# Altium PCB PCB_飞控板设计_7_2021-09-04.pcbdoc
Units mm, origin at the board's own origin, x right, y up, seen from the top; angles counter-clockwise.
Board outline 109.65 x 103 mm, 2 copper layers (Top Layer, Bottom Layer); 11 components, 42 nets, 154 pads, 13 vias.
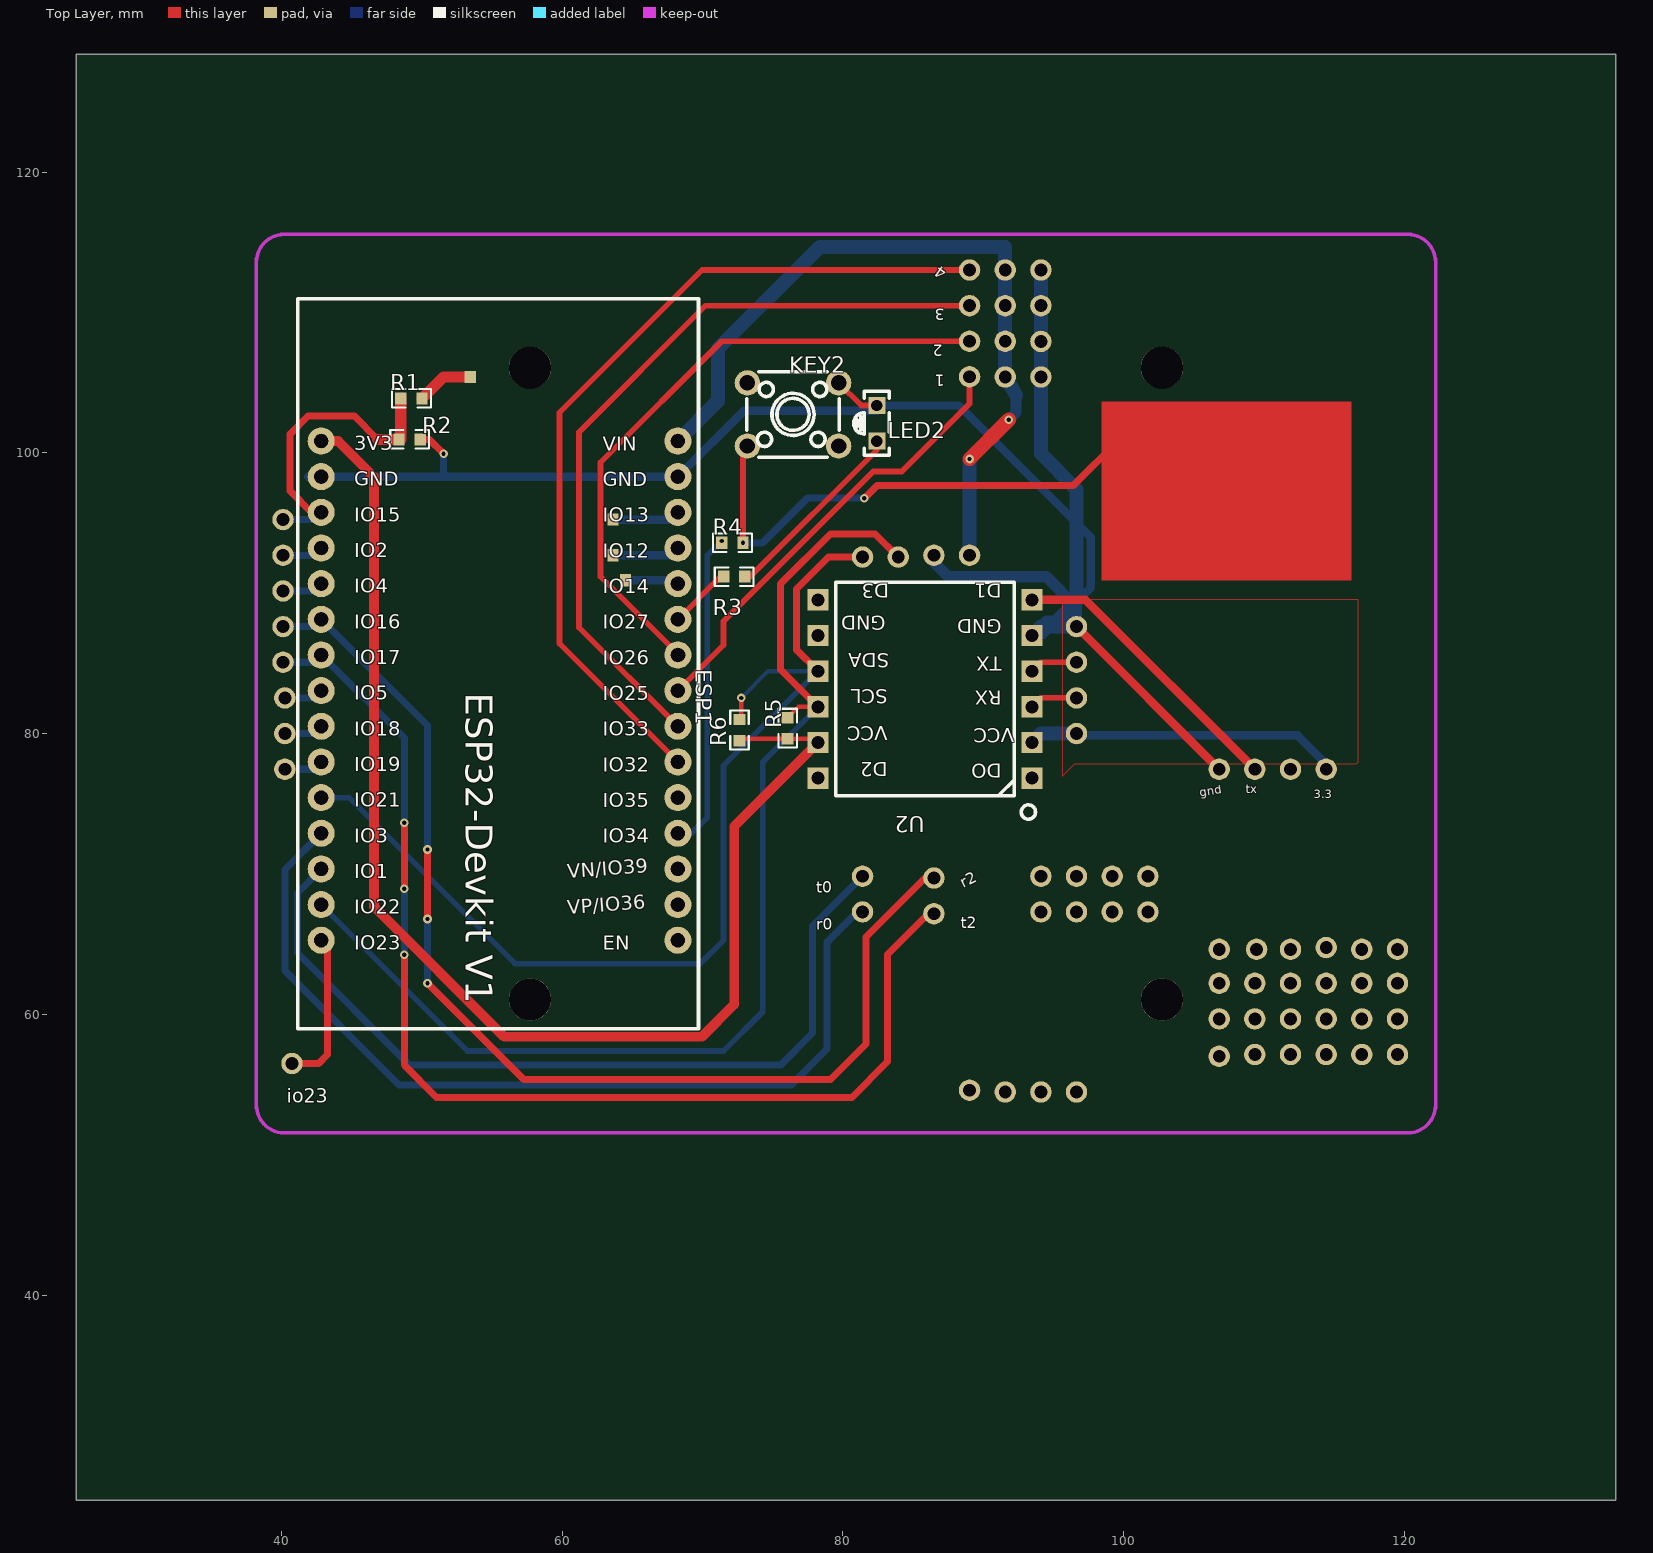
[diagram p0: Top Layer view]
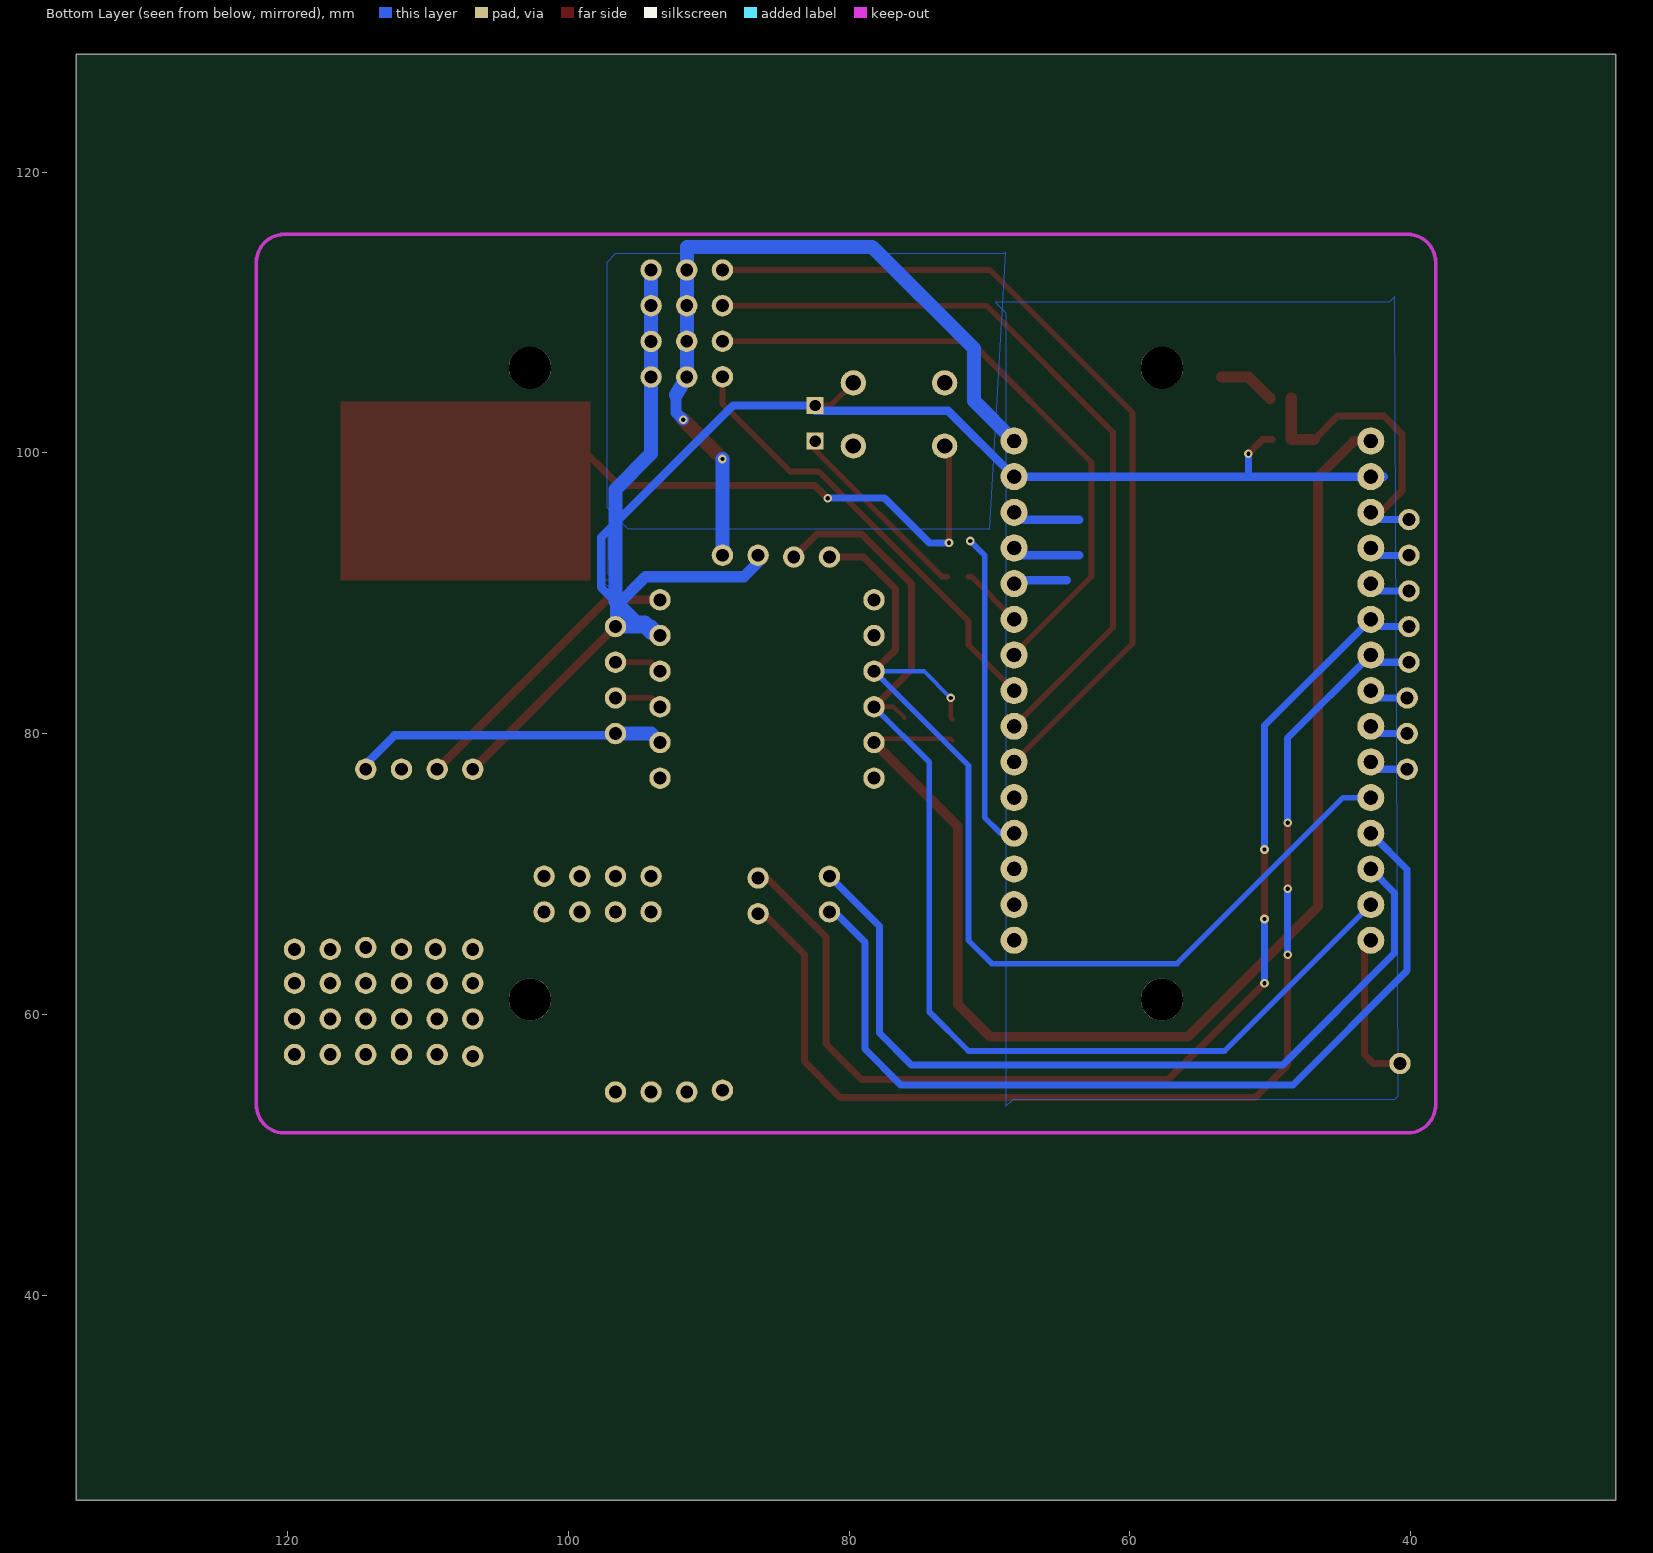
[diagram p1: Bottom Layer view, seen from below]

## Layer stack, top to bottom
Top Layer: signal copper (thickness not stored)
Dielectric: dielectric 0.32, FR-4, Dk 4.8
Bottom Layer: signal copper (thickness not stored)

## Board outline
135.054,25.4 25.4,25.4 25.4,128.4 135.054,128.4

## Components (designator, comment, footprint, x,y, rotation, side; value= is the part's Value field where it differs from the comment)
ESP1 "ESP32DEVKITV1" ESP32-DEVKITV1 55.118,84.331 r270 top
KEY2 "K4-6×6_TH" KEY-TH_4P-L6.0-W6.0-P4.50-LS6.5 76.454,102.746 r0 top
LED2 "LED" IRL80A 82.423,102.111 r0 top
R1 "5.64k" R0603 49.276,103.889 r180 top
R2 "2k" R0603 49.149,100.968 r0 top
R3 "220" R0603 72.263,91.189 r0 top
R4 "8.2k" R0603 72.136,93.602 r0 top
R5 "4.7k" R0603 76.073,80.394 r90 top
R6 "4.7k" R0603 72.644,80.267 r90 top
U2 "JY901" JY901 93.472,76.838 r180 top
? "" ? 80.264,46.699 r0 top

## Footprints (in the part's own frame and the unit in brackets; to place one, negate y for a bottom-side part, rotate by r counter-clockwise, add the part's x,y. Pads: shape width x height; smd on the part's side, far side on the other; paste and mask are expansions set on the pad)
ESP32-DEVKITV1 [mil]
  round 76 hole 39.36: 3V3(-650.39,-483.07) D1(549.61,-483.07) D2(-350.39,-483.07) D3(449.61,-483.07) D4(-250.39,-483.07) D5(49.61,-483.07) D12(-350.39,517.12) D13(-450.39,517.12) D14(-250.39,517.12) D15(-450.39,-483.07) D16(-150.39,-483.07) D17(-50.39,-483.07) D18(149.61,-483.07) D19(249.61,-483.07) D21(349.61,-483.07) D22(649.61,-483.07) D23(749.6,-483.07) D25(49.61,517.12) D26(-50.39,517.12) D27(-150.39,517.12) D32(249.61,517.12) D33(149.61,517.12) D34(449.61,517.12) D35(349.61,517.12) D36(649.61,517.12) D39(549.61,517.12) EN(749.6,517.12) GND@1(-550.39,517.12) GND@2(-550.39,-483.07) VIN(-650.39,517.12)
  silkscreen extent -1049,-548 998,575
IRL80A [mil]
  rect 47.7x47.7 hole 32: A(0,-50) K(0,50)
  silkscreen extent -65,-90 35,90
JY901 [mil]
  rect 60x60 smd: 1(0,0) 2(0,-100) 3(0,-200) 4(0,-300) 5(0,-400) 6(0,-500) 7(600,0) 8(600,-100) 9(600,-200) 10(600,-300) 11(600,-400) 12(600,-500)
  silkscreen extent -10,-549 551,115
KEY-TH_4P-L6.0-W6.0-P4.50-LS6.5 [mm]
  round 1.8 hole 1.1: 1(-3.251,-2.25) 2(3.251,-2.25) 3(3.251,2.25) 4(-3.251,2.25)
  silkscreen extent -3.3,-3.05 3.3,3.05
R0603 [mm]
  rect 0.806x0.864 smd: 1(-0.753,0) 2(0.753,0)
  silkscreen extent -1.39,-0.66 1.39,0.66
? [mm]

## Free pads (board coordinates)
  round 1.524 hole 0.914: 1(78.232,89.538) 2(78.232,86.998) 3(78.232,84.458) 4(78.232,81.918) 5(78.232,79.378) 6(78.232,76.838) 7(93.472,76.838) 8(93.472,79.378) 9(93.472,81.918) 10(93.472,84.458) 11(93.472,86.998) 12(93.472,89.538) 13(96.647,85.093) 14(96.647,82.553) 15(68.326,85.601) 16(89.027,113.033) 17(89.027,110.493) 18(89.027,107.953) 19(89.027,105.425) 20(91.567,105.413) 22(91.567,107.953) 23(91.567,110.492) 24(91.567,113.033) 25(94.107,113.033) 26(94.107,110.491) 27(94.107,107.943) 28(94.107,105.412) 29(96.647,87.633) 30(96.647,80.013) 32(81.407,69.853) 33(81.407,67.313) 35(40.259,77.473) 36(40.259,80.013) 37(40.259,82.553) 40(40.132,90.173) 41(40.132,92.713) 42(40.132,95.253) 43(40.767,56.518) 44(86.487,69.726) 45(86.487,67.186) 46(40.132,87.633) 47(40.132,85.093) 48(81.407,92.586) 49(83.947,92.586) 50(86.487,92.713) 51(89.027,92.713) 107(106.807,64.646) 108(109.474,64.646) 109(111.887,64.646) 110(114.427,64.773) 111(116.967,64.646) 112(119.507,64.646) 113(119.507,62.233) 114(116.967,62.233) 115(114.427,62.233) 116(111.887,62.233) 117(109.347,62.233) 118(106.807,62.233) 119(106.807,59.693) 120(109.347,59.693) 121(111.887,59.693) 122(114.427,59.693) 123(116.967,59.693) 124(119.507,59.693) 125(119.507,57.153) 126(116.967,57.153) 127(114.427,57.153) 128(111.887,57.153) 129(109.347,57.153) 130(106.807,57.026) 131(94.107,69.853) 132(96.647,69.853) 133(99.187,69.853) 134(101.727,69.853) 135(101.727,67.313) 137(99.187,67.313) 138(96.647,67.313) 139(94.107,67.313) 140(89.027,54.613) 141(91.567,54.486) 142(94.107,54.486) 143(96.647,54.486) 144(106.807,77.473) 145(109.347,77.473) 146(114.427,77.473) 147(111.887,77.473)
  rect 0.806x0.864 smd: 54(53.467,105.413) 63(63.627,95.253) 65(63.627,92.713) 67(64.516,90.935)
  round 3 hole 3 unplated: ""(57.727,61.073) ""(57.727,106.073) ""(102.727,61.073) ""(102.727,106.073)

## Via types
v1: diameter 0.611, hole 0.305, Top Layer to Bottom Layer, 13 vias

## Nets (pads, with @x,y where several pads share a name; then routed paths per layer and width w, separated by ;. In a path a pad name is that pad's centre, name@x,y a point inside that pad or via, vN(x,y) a via of type N, cw(c..) or ccw(c..) an arc to the next point about the centre after c; other vN are vias at no path point)
ESP1_D1: ESP1.D1 pad.32 | length 60.3
  Bottom Layer w0.5: ESP1.D1 41.148,68.671 41.148,64.392 49.149,56.391 75.565,56.391 77.851,58.677 77.851,66.297 78.105,66.551 pad.32
ESP1_D2: ESP1.D2 pad.41 | length 2.9
  Bottom Layer w0.5: pad.41 42.33,92.713 ESP1.D2
ESP1_D3: ESP1.D3 pad.33 | length 64.9
  Bottom Layer w0.5: ESP1.D3 40.259,70.322 40.259,63.122 48.387,54.994 76.327,54.994 78.867,57.534 78.867,65.154 81.026,67.313 pad.33
ESP1_D4: ESP1.D4 pad.40 | length 2.9
  Bottom Layer w0.5: pad.40 42.33,90.173 ESP1.D4
ESP1_D5: ESP1.D5 pad.37 | length 2.8
  Bottom Layer w0.5: pad.37 42.33,82.553 ESP1.D5
ESP1_D12: ESP1.D12 pad.65 | length 4.8
  Bottom Layer w0.6: 63.627,92.713 67.735,92.713 ESP1.D12
ESP1_D13: ESP1.D13 pad.63 | length 4.8
  Bottom Layer w0.6: 63.627,95.253 67.735,95.253 ESP1.D13
ESP1_D14: ESP1.D14 pad.67 | length 3.8
  Bottom Layer w0.6: 64.516,90.935 68.009,90.935 ESP1.D14
ESP1_D15: ESP1.D15 pad.42 R1.2 R2.1 | length 21.8
  Top Layer w0.5: ESP1.D15 42.154,95.771 40.64,97.285 40.64,101.349 41.91,102.619 45.212,102.619 46.863,100.968
  Top Layer w0.8: 46.863,100.968 48.522,100.968 R1.2
  Bottom Layer w0.5: pad.42 42.33,95.253 ESP1.D15
ESP1_D16: ESP1.D16 pad.44 pad.46 | length 81.3
  Top Layer w0.5: v1(50.419,62.233) 57.277,55.375 79.121,55.375 81.661,57.915 81.661,65.535 85.852,69.726 pad.44 ; v1(50.419,66.805) v1(50.419,71.758)
  Bottom Layer w0.5: pad.46 42.33,87.633 ESP1.D16 50.419,80.58 v1(50.419,71.758) ; v1(50.419,62.233) v1(50.419,66.805)
ESP1_D17: ESP1.D17 pad.45 pad.47 | length 83.2
  Top Layer w0.5: v1(48.768,64.265) 48.768,56.391 51.054,54.105 80.645,54.105 83.185,56.645 83.185,64.265 86.106,67.186 pad.45 ; v1(48.768,68.964) v1(48.768,73.663)
  Bottom Layer w0.5: pad.47 42.33,85.093 ESP1.D17 48.768,79.691 v1(48.768,73.663) ; v1(48.768,64.265) v1(48.768,68.964)
ESP1_D18: ESP1.D18 pad.36 | length 2.8
  Bottom Layer w0.5: pad.36 42.33,80.013 ESP1.D18
ESP1_D19: ESP1.D19 pad.35 | length 2.8
  Bottom Layer w0.5: pad.35 42.33,77.473 ESP1.D19
ESP1_D23: ESP1.D23 pad.43 | length 11.1
  Top Layer w0.5: pad.43 42.672,56.518 43.307,57.153 43.307,64.832 ESP1.D23
ESP1_D25: ESP1.D25 pad.19 | length 32.4
  Top Layer w0.4: ESP1.D25 71.501,86.32 71.501,88.014 82.169,98.682 84.201,98.682 89.027,103.508 pad.19@89.027,105.667
ESP1_D26: ESP1.D26 pad.15 pad.18 | length 45.9
  Top Layer w0.4: pad.15 62.738,91.189 62.738,99.317 71.374,107.953 pad.18
ESP1_D32: ESP1.D32 pad.16 | length 61.8
  Top Layer w0.4: ESP1.D32 59.817,86.426 59.817,102.873 69.977,113.033 pad.16
ESP1_D33: ESP1.D33 pad.17 | length 55.4
  Top Layer w0.4: ESP1.D33 61.214,87.569 61.214,101.476 70.231,110.493 pad.17
ESP1_D35: ESP1.D35
ESP1_D36: ESP1.D36
ESP1_D39: ESP1.D39
ESP1_EN: ESP1.EN
ESP1_VIN: ESP1.VIN pad.20 pad.22 pad.23 pad.24 pad.51 | length 54.8
  Top Layer w1: v1(89.027,99.571) v1(91.821,102.365)
  Bottom Layer w0.8: v1(91.821,102.365) 92.329,102.873 92.329,104.143
  Bottom Layer w1: ESP1.VIN 71.12,103.719 71.12,107.445 78.359,114.684 91.567,114.684 pad.24 pad.23 pad.22 pad.20 92.329,104.143 ; pad.51 v1(89.027,99.571)
GND: ESP1.GND@1 ESP1.GND@2 KEY2.3 LED2.K pad.11 pad.25 pad.26 pad.27 pad.28 pad.29 pad.50 pad.144 R2.2 U2.5 | length 145.9
  Top Layer w0.4: KEY2.3 81.321,103.381 LED2.K
  Top Layer w0.5: R2.2 50.546,100.968 v1(51.562,99.952)
  Top Layer w0.6: pad.29 pad.144
  Bottom Layer w0.5: 49.698,98.311 51.562,98.311 v1(51.562,99.952) ; pad.29 96.647,90.548 pad.29
  Bottom Layer w0.6: 41.91,98.311 68.253,98.311 72.941,103 82.423,103 LED2.K 88.265,103.381 97.663,93.983 97.663,90.427 94.234,86.998 pad.11
  Bottom Layer w0.8: pad.50 86.487,92.205 87.503,91.189 94.488,91.189 96.647,89.03 pad.29 ; pad.11 94.502,88.028 95.264,88.028
  Bottom Layer w1: pad.11 94.107,87.633 pad.29 ; pad.25 pad.26 pad.27 pad.28 94.107,99.952 96.647,97.412 96.647,89.411 95.298,88.062
KEY2_2: KEY2.2
KEY2_4: KEY2.4
R1_1: pad.54 R1.1 | length 4.1
  Top Layer w0.8: R1.1 51.553,105.413 pad.54
R3_1: ESP1.D27 R3.1 | length 4.5
  Top Layer w0.4: ESP1.D27 71.291,91.189 R3.1
R3_2: LED2.A R3.2 | length 13.8
  Top Layer w0.4: R3.2 73.406,91.189 82.423,100.206 LED2.A
R4_1: ESP1.D34 R4.1 | length 22.7
  Bottom Layer w0.4: ESP1.D34 69.225,72.911 70.358,74.044 70.358,92.713 v1(71.374,93.729)
R4_2: KEY2.1 R4.2 | length 36.9
  Top Layer w0.4: v1(72.889,93.602) 72.889,100.182 KEY2.1
  Top Layer w0.5: v1(81.534,96.777) 82.423,97.666 96.393,97.666 99.695,100.968
  Bottom Layer w0.5: v1(72.889,93.602) 74.295,93.602 77.47,96.777 v1(81.534,96.777)
U2_1: pad.7 U2.1
U2_2: pad.8 pad.30 pad.146 U2.2 | length 22.5
  Bottom Layer w0.6: pad.30 96.774,79.886 112.395,79.886 114.427,77.854 pad.146
  Bottom Layer w1: pad.8 94.107,80.013 pad.30
U2_3: pad.9 pad.14 U2.3 | length 3.4
  Top Layer w0.4: U2.3 94.107,82.553 pad.14
U2_4: pad.10 pad.13 U2.4 | length 3.4
  Top Layer w0.4: U2.4 94.107,85.093 pad.13
U2_6: pad.12 pad.145 U2.6 | length 20.9
  Top Layer w0.6: U2.6 97.282,89.538 pad.145
U2_7: pad.6 U2.7
U2_9: ESP1.D22 pad.4 pad.49 R5.2 U2.9 | length 83.2
  Top Layer w0.3: R5.2 76.844,81.918 U2.9
  Top Layer w0.5: U2.9 75.565,84.585 75.565,90.681 79.121,94.237 82.296,94.237 pad.49
  Bottom Layer w0.4: ESP1.D22 53.271,57.407 71.501,57.407 74.295,60.201 74.295,77.981 pad.4
U2_10: ESP1.D21 pad.3 pad.48 pad.107 pad.108 pad.109 pad.110 pad.111 pad.112 pad.113 pad.114 pad.115 pad.116 pad.117 pad.118 pad.119 pad.120 pad.121 pad.122 pad.123 pad.124 pad.125 pad.126 pad.127 pad.128 pad.129 pad.130 pad.131 pad.132 pad.133 pad.134 pad.135 pad.137 pad.138 pad.139 pad.140 pad.141 pad.142 pad.143 pad.147 R6.2 U2.10 | length 82.4
  Top Layer w0.3: R6.2 72.771,81.147 v1(72.771,82.553)
  Top Layer w0.5: U2.10 76.708,85.982 76.708,90.3 78.994,92.586 pad.48
  Bottom Layer w0.3: 74.676,84.458 v1(72.771,82.553) 74.676,84.458 ; 74.676,84.458 pad.3 74.676,84.458
  Bottom Layer w0.4: ESP1.D21 44.821,75.451 56.642,63.63 69.85,63.63 71.501,65.281 71.501,77.727 pad.3
U2_11: pad.2 U2.11
U2_12: pad.1 U2.12
VCC: ESP1.3V3 pad.5 R5.1 R6.1 U2.8 | length 92.8
  Top Layer w0.3: R6.1@72.644,79.513 72.771,79.64 76.073,79.64 77.969,79.64 U2.8
  Top Layer w0.7: ESP1.3V3 44.059,100.851 46.609,98.301 46.609,67.694 55.88,58.423 69.977,58.423 72.263,60.709 72.263,73.409 U2.8

## Polygon pours and split planes (outlines as drawn)
GND on Bottom Layer (solid): 96.901,90.3 96.647,90.554 96.647,94.491 96.901,94.237 97.536,94.237 97.663,94.11 97.663,90.935 96.901,90.3
GND on Bottom Layer (solid): 97.663,90.427 97.282,90.046 96.901,90.046 96.901,90.427 97.028,90.554 97.028,90.681 97.038,90.935 96.774,90.935 96.774,93.856 96.647,93.983 96.647,94.237 96.774,94.364 97.282,94.364 97.282,94.11 97.155,93.983 97.155,93.856 97.038,90.935 97.536,90.935 97.663,90.808 97.663,90.427
GND on Bottom Layer (solid): 96.774,89.792 97.155,90.173 97.155,90.3 96.774,90.681 96.774,90.935 97.155,91.316 97.155,94.11 97.282,94.237 97.282,94.491 96.774,94.999 96.647,94.999
GND on Bottom Layer (solid): 68.834,114.303 68.961,114.176 96.647,114.176 97.282,113.541 97.282,96.142 95.758,94.618 69.977,94.618
GND on Bottom Layer (solid): 41.148,111.128 41.529,110.747 69.596,110.747 68.834,109.985 68.834,53.47 68.326,53.978 41.148,53.978 40.894,54.232 40.894,54.994
GND on Top Layer (solid): 95.504,89.538 95.631,89.411 95.631,76.965 96.52,77.854 116.586,77.854 116.713,77.981 116.713,89.538

## Keep-outs
Keep-Out Layer:
  lines w0.254: 38.227,53.573 ccw(c40.227,53.573) 40.227,51.573 ; 38.227,113.573 cw(c40.227,113.573) 40.227,115.573 ; 120.227,51.573 ccw(c120.227,53.573) 122.227,53.573 ; 120.227,115.573 cw(c120.227,113.573) 122.227,113.573

## Other copper
Top Layer:
  region net R4_2: 98.425,95.888 98.425,103.635 116.205,103.635 116.205,90.935 98.425,90.935

## Silkscreen, mask and mechanical layers (free items; w line width, h text height)
Top Overlay:
  text "4" at 87.478,112.979 h0.8 r145
  text "3" at 87.249,110.258 h0.8 r180
  text "2" at 87.122,107.718 h0.8 r180
  text "1" at 87.249,105.559 h0.8 r180
  text "tx" at 108.712,75.776 h0.6
  text "gnd" at 105.457,75.525 h0.6 r9
  text "3.3" at 113.538,75.395 h0.6
  text "r2" at 88.567,68.985 h0.8 r26
  text "t0" at 78.105,68.691 h0.8
  text "t2" at 88.392,66.151 h0.8
  text "r0" at 78.105,66.024 h0.8
  text "io23" at 40.386,53.732 h1

## Text inside footprints (layer, text, board x,y; h text height)
ESP1: Top Overlay "3V3" at 45.188,100.191 h1.02; Top Overlay "GND" at 45.188,97.651 h1.02; Top Overlay "IO15" at 45.188,95.111 h1.02; Top Overlay "IO2" at 45.188,92.571 h1.02; Top Overlay "IO4" at 45.188,90.031 h1.02; Top Overlay "IO16" at 45.188,87.491 h1.02; Top Overlay "IO17" at 45.188,84.951 h1.02; Top Overlay "IO5" at 45.188,82.411 h1.02; Top Overlay "IO18" at 45.188,79.871 h1.02; Top Overlay "IO19" at 45.188,77.331 h1.02; Top Overlay "IO21" at 45.188,74.791 h1.02; Top Overlay "IO3" at 45.188,72.251 h1.02; Top Overlay "IO1" at 45.188,69.711 h1.02; Top Overlay "IO22" at 45.188,67.171 h1.02; Top Overlay "IO23" at 45.188,64.631 h1.02; Top Overlay "VIN" at 62.908,100.171 h1.02; Top Overlay "GND" at 62.908,97.631 h1.02; Top Overlay "IO13" at 62.908,95.091 h1.02; Top Overlay "IO12" at 62.908,92.551 h1.02; Top Overlay "IO14" at 62.908,90.011 h1.02; Top Overlay "IO27" at 62.908,87.471 h1.02; Top Overlay "IO26" at 62.908,84.931 h1.02; Top Overlay "IO25" at 62.908,82.391 h1.02; Top Overlay "IO33" at 62.908,79.851 h1.02; Top Overlay "IO32" at 62.908,77.311 h1.02; Top Overlay "IO35" at 62.908,74.771 h1.02; Top Overlay "IO34" at 62.908,72.231 h1.02; Top Overlay "VN/IO39" at 60.403,69.692 h1.02 r4; Top Overlay "VP/IO36" at 60.403,67.152 h1.02 r4; Top Overlay "EN" at 62.908,64.611 h1.02; Top Overlay "ESP32-Devkit V1" at 53.137,82.934 h1.93 r270; Document "ESP32-DEVKITV1" at 39.148,72.981 h1.27 r270
U2: Top Overlay "DO" at 91.313,77.854 h1.02 r180; Top Overlay "VCC" at 92.202,80.394 h1.02 r180; Top Overlay "RX" at 91.313,83.061 h1.02 r180; Top Overlay "TX" at 91.313,85.474 h1.02 r180; Top Overlay "GND" at 91.313,88.141 h1.02 r180; Top Overlay "D1" at 91.313,90.681 h1.02 r180; Top Overlay "D2" at 83.185,77.981 h1.02 r180; Top Overlay "VCC" at 83.185,80.521 h1.02 r180; Top Overlay "SCL" at 83.185,83.188 h1.02 r180; Top Overlay "SDA" at 83.312,85.728 h1.02 r180; Top Overlay "GND" at 83.058,88.395 h1.02 r180; Top Overlay "D3" at 83.312,90.681 h1.02 r180